# EAGLE board Anti thept2HELMET (1) (EAGLE 7.6.0)
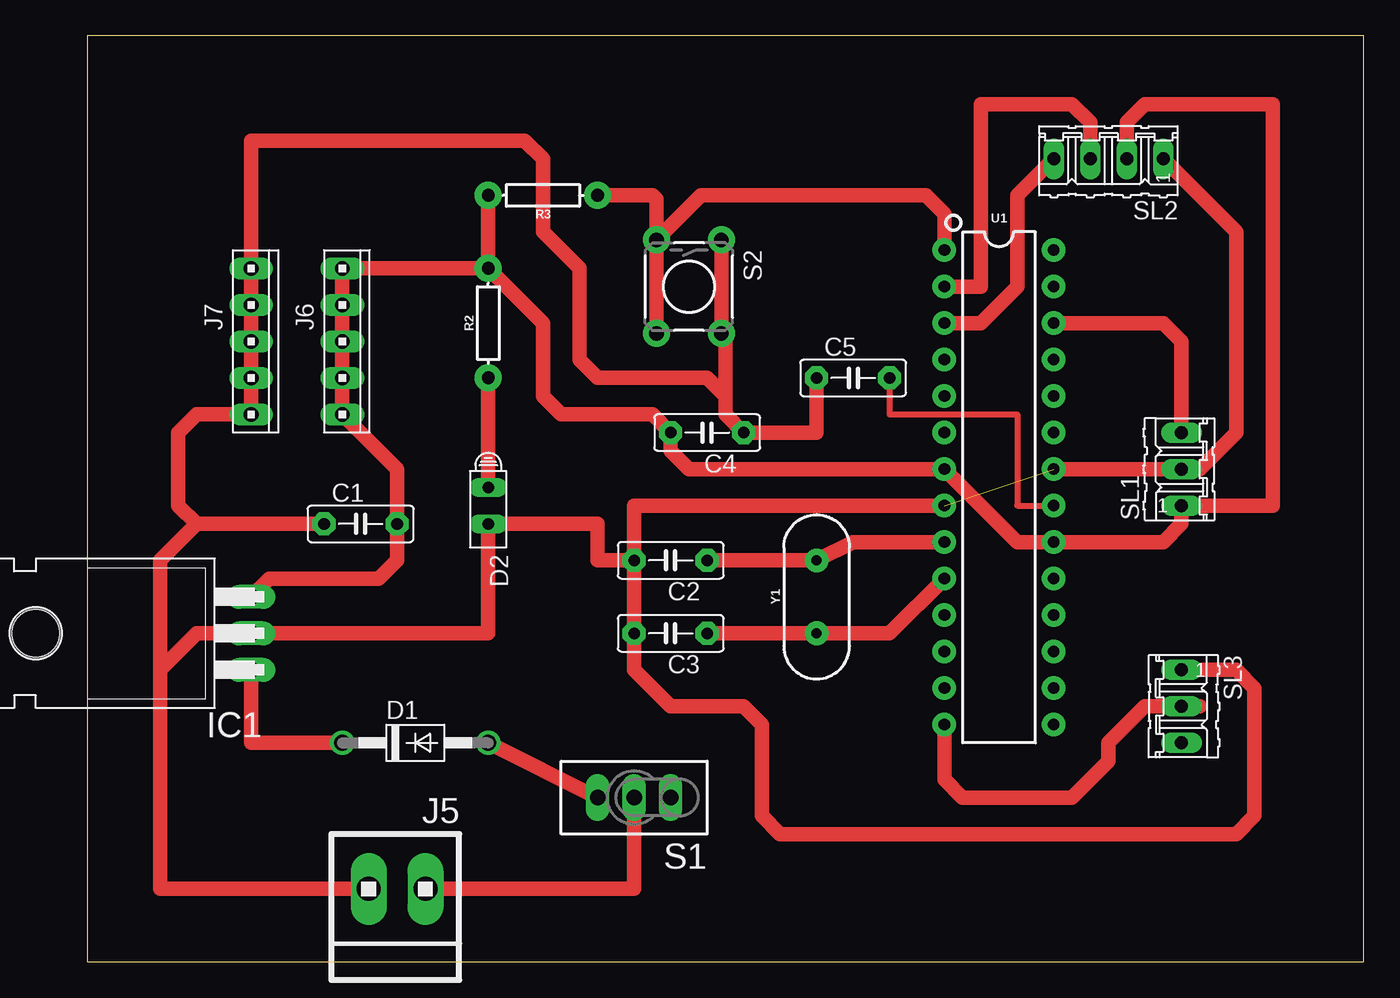
[diagram p0: board, top side]

Size 88.88 x 64.44 mm. Coordinates in mm from the lower left corner, seen from the top.
Outline: 0,0 88.88,0 88.88,64.44 0,64.44 0,0
Copper layers (1*16): Top 0.035mm / dielectric 1.5mm / Bottom 0.035mm
Design rules "default": minimum track width 10mil, minimum drill 24mil, track to track 8mil, track to pad 8mil, pad to pad 8mil, via to via 8mil, smd to smd 8mil, copper to edge 40mil, drill to drill 8mil, minimum pad ring 10mil, minimum via ring 8mil, stop-mask expansion 4mil, vias tented up to drill 0mil, thermal gap 10mil

## Footprints (pad centres in the part's own frame; a part is rotated, then mirrored left to right if it is on the bottom)
C5B2.5 = drill 0.813 pad 1.6 octagon: 1 -2.54,0; 2 2.54,0
DO41-10 = drill 1.118: A 5.08,0; C -5.08,0
HLMP6 = drill 0.813 long: A -1.27,0; K 1.27,0
TO220H = drill 1.118 long: 1 -2.54,-10.16; 2 0,-10.16; 3 2.54,-10.16 | hole 3.302: 0,4.826
1X2MTA = drill 1.676 long: 1 1.981,0; 2 -1.981,0
10X05MTA = drill 1.016 long: 1 5.08,0; 2 2.54,0; 3 0,0; 4 -2.54,0; 5 -5.08,0
AXIAL-0.3 = drill 0.9 pad 1.88: P$1 -3.81,0; P$2 3.81,0
TL3XPO = drill 1.1 pad 1.422 long: 1 -2.54,0; 2 0,0; 3 2.54,0
TACTILE-PTH = drill 1.016 pad 1.88: 1 -3.251,2.261; 2 3.251,2.261; 3 -3.251,-2.261; 4 3.251,-2.261
03P = drill 0.914 long: 1 -2.54,0; 2 0,0; 3 2.54,0
04P = drill 0.914 long: 1 -3.81,0; 2 -1.27,0; 3 1.27,0; 4 3.81,0
DIP28 = drill 0.813 pad 1.626: 1 -16.51,-3.81; 2 -13.97,-3.81; 3 -11.43,-3.81; 4 -8.89,-3.81; 5 -6.35,-3.81; 6 -3.81,-3.81; 7 -1.27,-3.81; 8 1.27,-3.81; 9 3.81,-3.81; 10 6.35,-3.81; 11 8.89,-3.81; 12 11.43,-3.81; 13 13.97,-3.81; 14 16.51,-3.81; 15 16.51,3.81; 16 13.97,3.81; 17 11.43,3.81; 18 8.89,3.81; 19 6.35,3.81; 20 3.81,3.81; 21 1.27,3.81; 22 -1.27,3.81; 23 -3.81,3.81; 24 -6.35,3.81; 25 -8.89,3.81; 26 -11.43,3.81; 27 -13.97,3.81; 28 -16.51,3.81
HC49US = drill 0.7 pad 1.651: 1 -2.54,0; 2 2.54,0

## Placement (x,y rotation side)
C1  [C5B2.5]  19.05,30.48 0 top
C2  [C5B2.5]  40.64,27.94 180 top
C3  [C5B2.5]  40.64,22.86 180 top
C4  [C5B2.5]  43.18,36.83 180 top
C5  [C5B2.5]  53.34,40.64 0 top
D1  1N4004  [DO41-10]  22.86,15.24 0 top
D2  HLMP6  [HLMP6]  27.94,31.75 270 top
IC1  7805T  [TO220H]  1.27,22.86 90 top
J5  [1X2MTA]  21.59,5.08 180 top
J6  [10X05MTA]  17.78,43.18 270 top
J7  [10X05MTA]  11.43,43.18 270 top
R2  330  [AXIAL-0.3]  27.94,44.45 90 top
R3  330  [AXIAL-0.3]  31.75,53.34 180 top
S1  TL38PO  [TL3XPO]  38.1,11.43 180 top
S2  [TACTILE-PTH]  41.91,46.99 270 top
SL1  [03P]  76.2,34.29 90 top
SL2  [04P]  71.12,55.88 180 top
SL3  [03P]  76.2,17.78 270 top
U1  328P  [DIP28]  63.5,33.02 270 top
Y1  16MHz  [HC49US]  50.8,25.4 90 top

## Library data of the parts
C1-C5 = capacitor-wima
D1 = diode
D2 = display-hp; MF: AGILENT TECHNOLOGIES; MPN: HLMP-6500; OC_FARNELL: 1652490; OC_NEWARK: 40K0088
IC1 = linear
J5-J7 = con-amp
R2 R3 = SparkFun-Resistors; PROD_ID: RES-8371
S1 = switch
S2 = SparkFun-Retired
SL1-SL3 = con-amp-quick; OC_FARNELL: unknown; OC_NEWARK: unknown
U1 = SparkFun-IC-Microcontroller; PROD_ID: IC-09136
Y1 = SparkFun-Clocks; PROD_ID: XTAL-08181; SF_ID: COM-00536

## Nets
3.3V: C1.1 C2.2 C3.2 C4.1 C5.1 D2.K IC1.2 J5.1 J7.1 J7.2 J7.3 J7.4 J7.5 S2.1 S2.2 SL1.2 SL2.1 SL3.1 U1.8 U1.22
+5V: C1.2 C4.2 IC1.3 J6.1 J6.2 J6.3 J6.4 J6.5 R2.P$2 R3.P$2 SL1.1 SL2.2 U1.7 U1.20
+9V: D1.A S1.3
N$1: R3.P$1 S2.3 S2.4 U1.1
N$2: SL1.3 U1.26
N$3: SL2.4 U1.3
N$4: C5.2 U1.21
N$5: SL2.3 U1.2
N$6: SL3.2 U1.14
N$7: D2.A R2.P$1
N$8: C3.1 U1.10 Y1.1
N$9: C2.1 U1.9 Y1.2
N$14: J5.2 S1.2
N$16: D1.C IC1.1

## Tracks (layer width: path | path; a pad name or v marks a point on that pad's centre or on a via)
3.3V  (1 unrouted)
  Top 1.016: J5.1 5.08,5.08 5.08,20.32 | 5.08,20.32 7.62,22.86 IC1.2 27.94,22.86 D2.K 35.56,30.48 35.56,27.94 C2.2 | SL2.1 80.01,50.8 80.01,36.83 77.47,34.29 SL1.2 U1.22 | SL3.1 80.01,20.32 81.28,19.05 81.28,10.16 80.01,8.89 48.26,8.89 46.99,10.16 46.99,16.51 45.72,17.78 40.64,17.78 38.1,20.32 C3.2 C2.2 | C1.1 7.62,30.48 | 7.62,30.48 5.08,27.94 5.08,20.32 | 7.62,30.48 6.35,31.75 6.35,36.83 7.62,38.1 J7.1 J7.2 J7.3 J7.4 J7.5 11.43,57.15 30.48,57.15 31.75,55.88 31.75,50.8 34.29,48.26 34.29,41.91 35.56,40.64 43.18,40.64 44.45,39.37 | C5.1 50.8,36.83 C4.1 44.45,38.1 44.45,39.37 | C2.2 38.1,31.75 U1.8 | 44.45,39.37 44.45,43.46 S2.2 S2.1
+5V
  Top 1.016: SL2.2 72.39,58.42 73.66,59.69 82.55,59.69 82.55,31.75 SL1.1 76.2,30.48 74.93,29.21 U1.20 64.77,29.21 U1.7 41.91,34.29 40.64,35.56 C4.2 39.37,38.1 33.02,38.1 31.75,39.37 31.75,44.45 R2.P$2 | IC1.3 12.7,26.67 20.32,26.67 21.59,27.94 C1.2 21.59,34.29 J6.1 J6.2 J6.3 J6.4 J6.5 R2.P$2 | R2.P$2 R3.P$2
+9V
  Top 1.016: D1.A S1.3
N$1
  Top 1.016: S2.4 S2.3 | R3.P$1 39.37,53.34 39.65,53.06 S2.3 | S2.3 42.75,53.34 58.42,53.34 59.69,52.07 U1.1
N$2
  Top 1.016: SL1.3 76.2,43.18 74.93,44.45 U1.26
N$3
  Top 1.016: SL2.4 64.77,53.34 64.77,46.99 62.23,44.45 U1.3
N$4
  Top 0.406: C5.2 55.88,38.1 64.77,38.1 64.77,31.75 U1.21
N$5
  Top 1.016: U1.2 62.23,46.99 62.23,59.69 68.58,59.69 69.85,58.42 SL2.3
N$6
  Top 1.016: 77.47,17.78 SL3.2 73.66,17.78 71.12,15.24 71.12,13.97 68.58,11.43 60.96,11.43 59.69,12.7 U1.14
N$7
  Top 1.016: R2.P$1 D2.A
N$8
  Top 1.016: C3.1 Y1.1 55.88,22.86 U1.10
N$9
  Top 1.016: C2.1 Y1.2 53.34,29.21 U1.9
N$14
  Top 1.016: J5.2 38.1,5.08 S1.2
N$16
  Top 1.016: IC1.1 11.43,15.24 D1.C